# Altium PCB TAS5822.PcbDoc
Units mm, origin at the board's own origin, x right, y up, seen from the top; angles counter-clockwise.
Board outline 40 x 40 mm, 2 copper layers (Component Side, Solder Side), stack 1.57 mm thick; 38 components, 28 nets, 155 pads, 28 vias.
Unrouted connection lines stored in the file: 24.
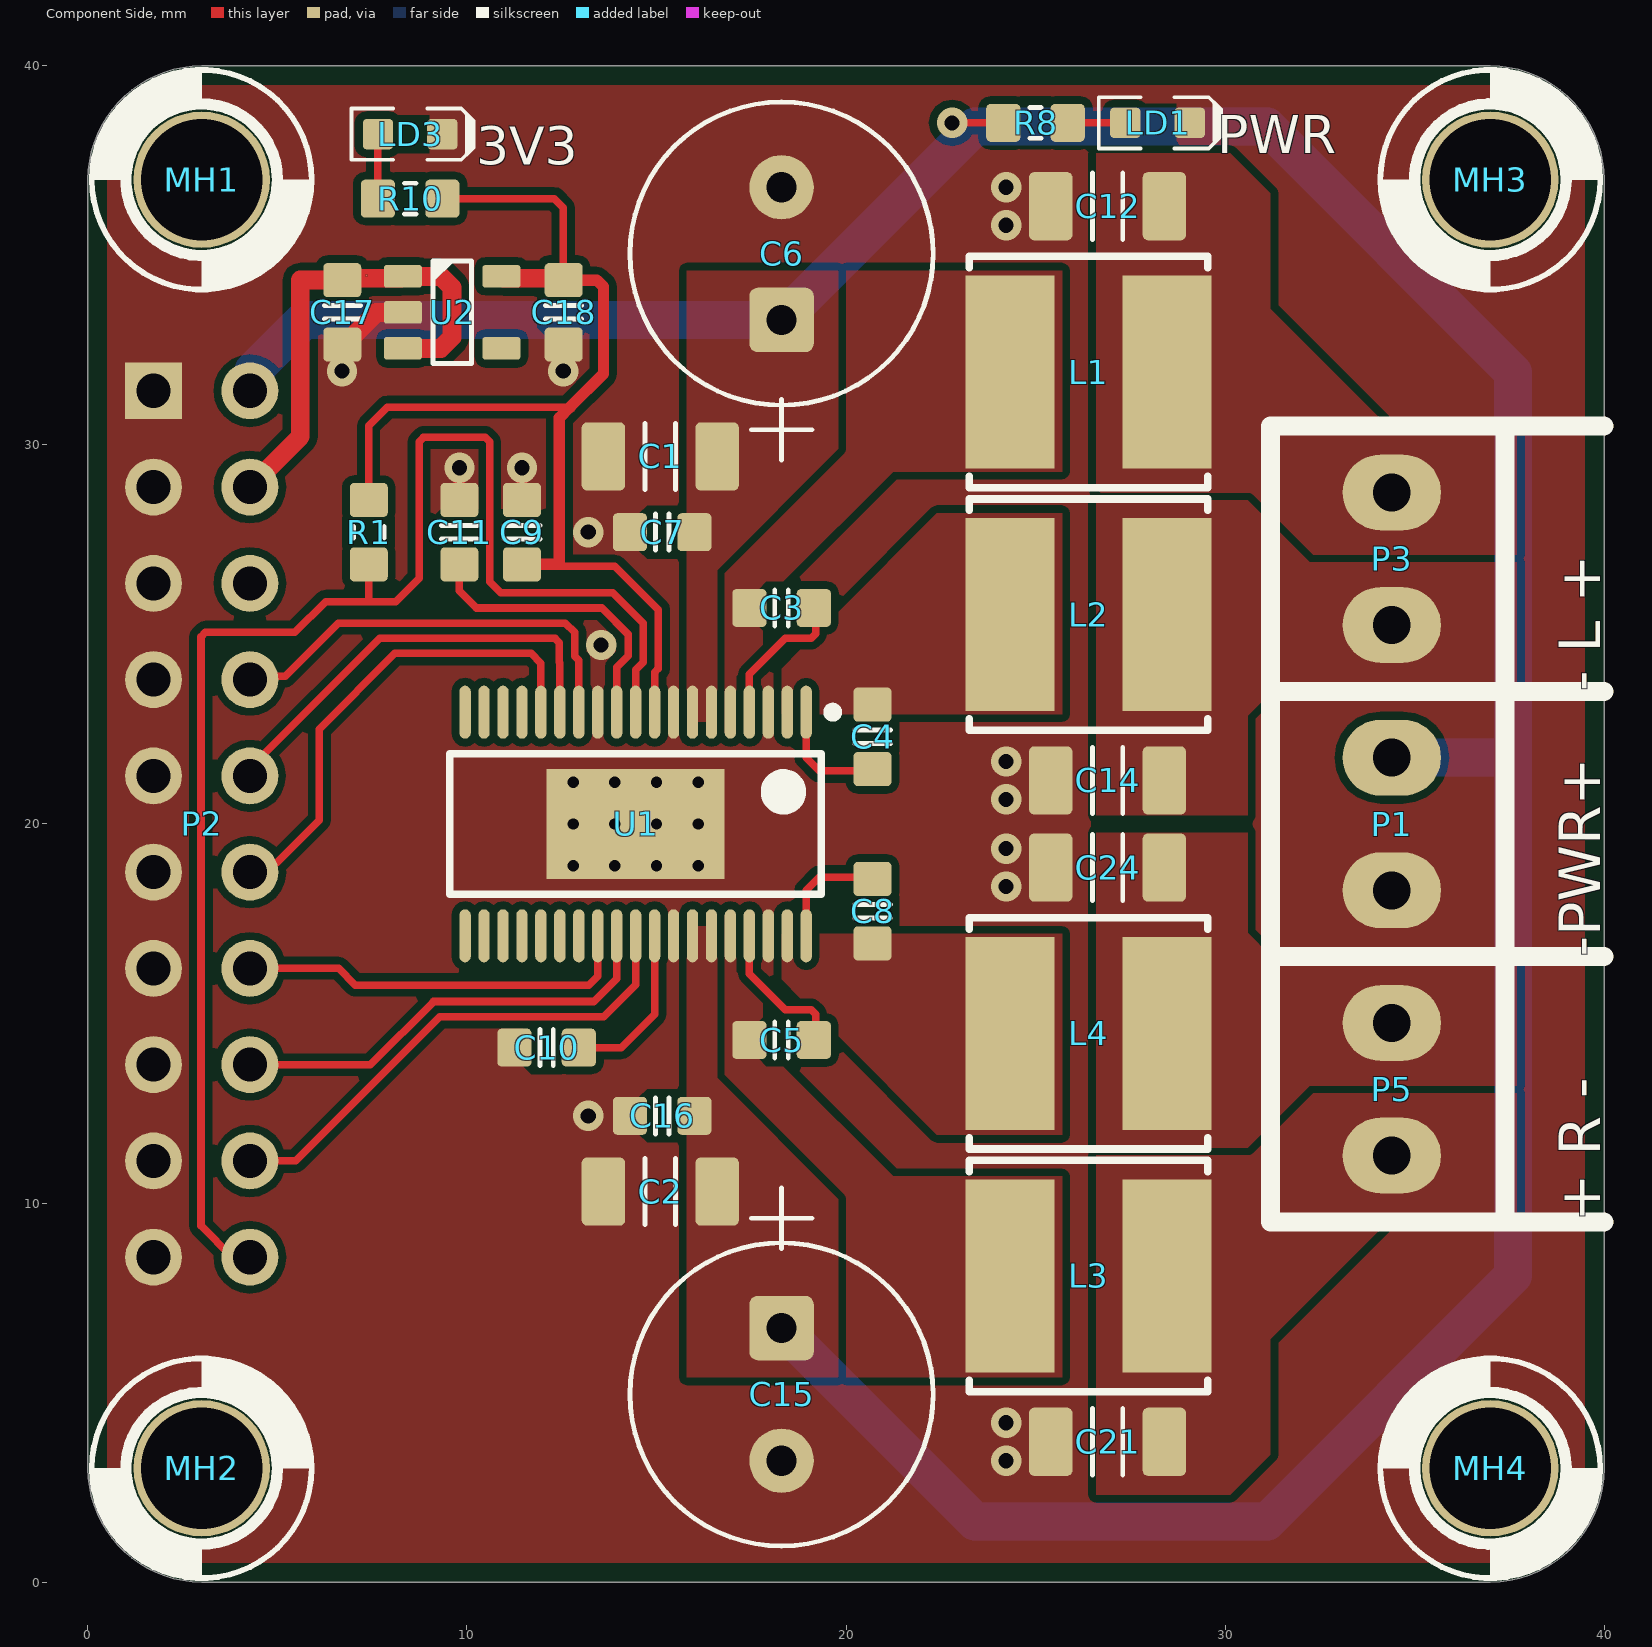
[diagram p0: Component Side view]
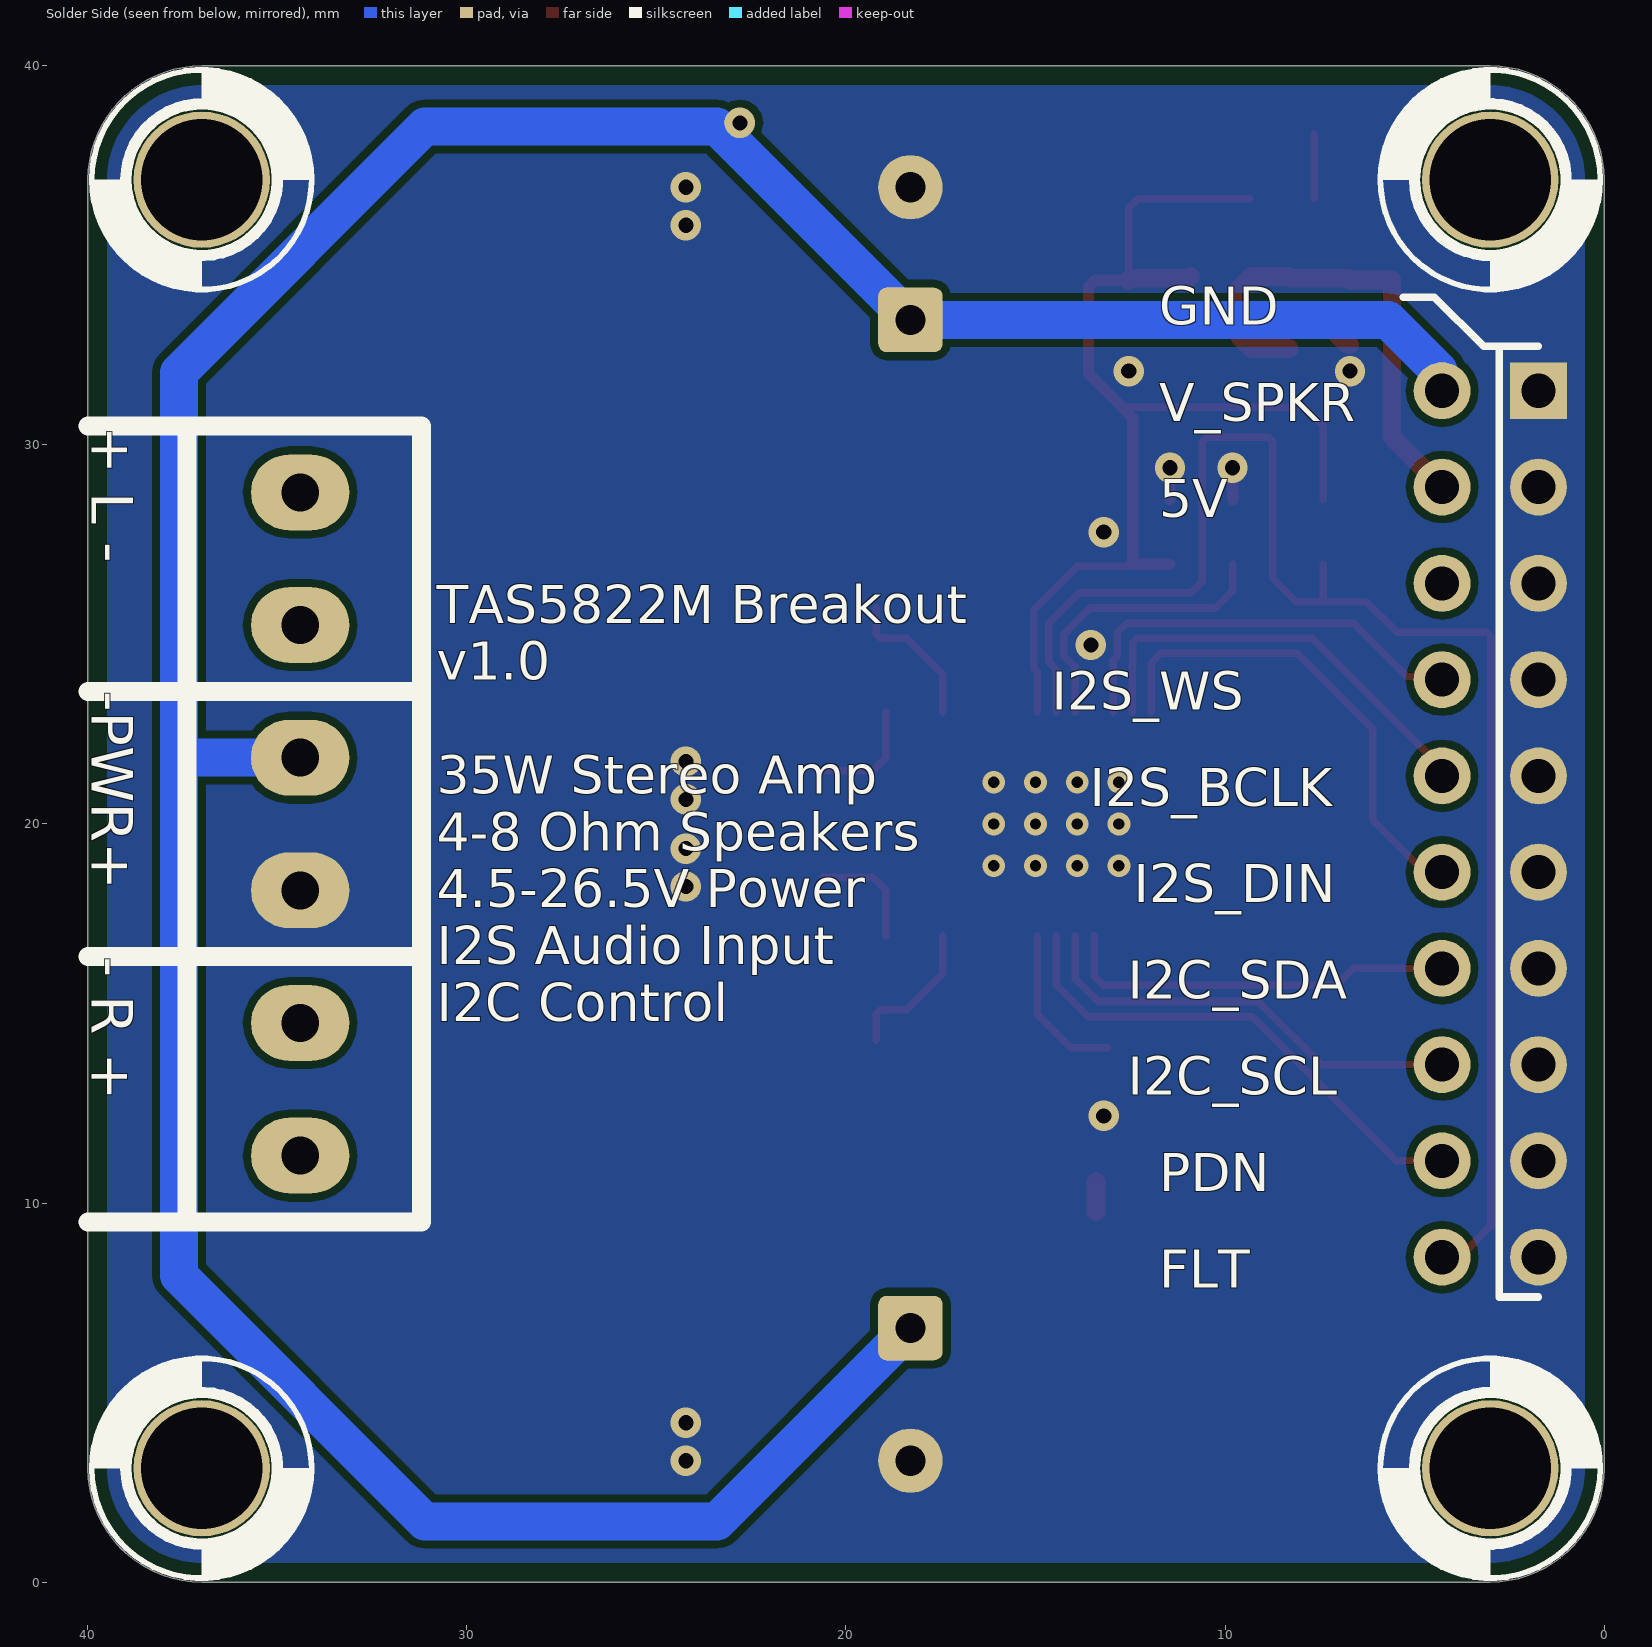
[diagram p1: Solder Side view, seen from below]
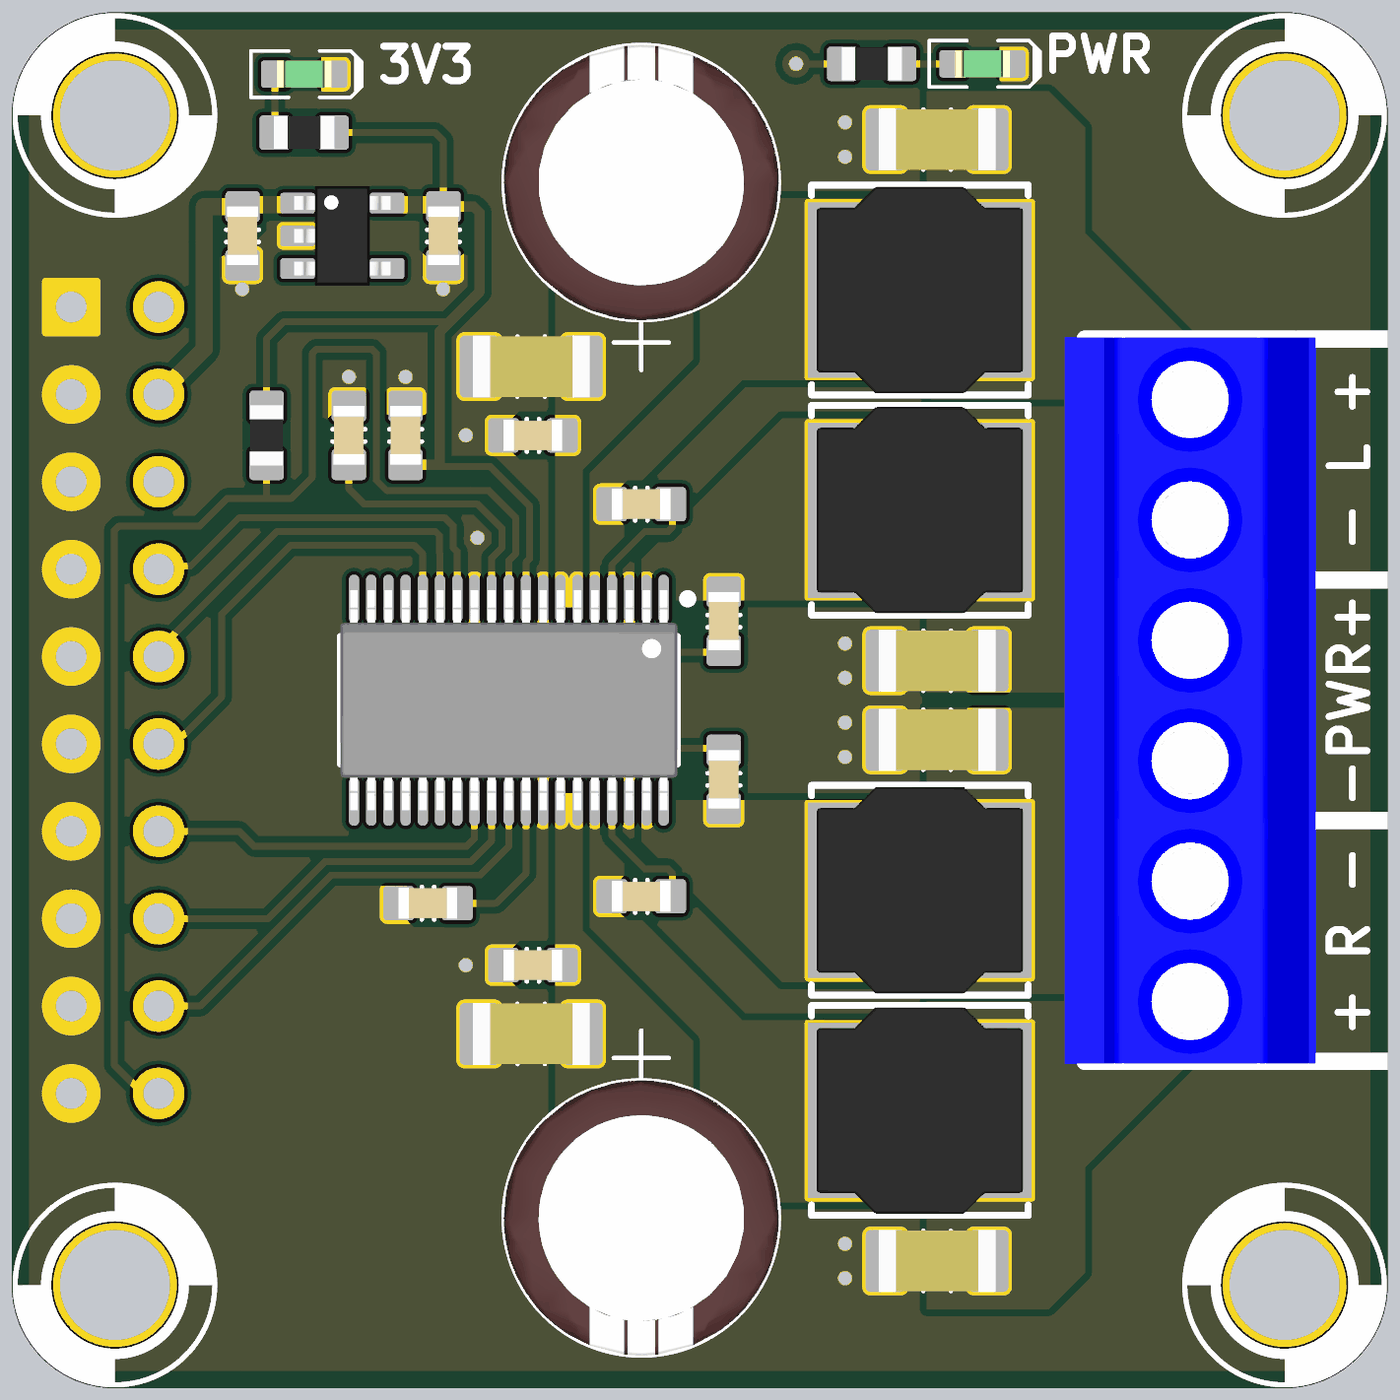
[diagram p2: 3D render of the assembled board from above, using the file's embedded part models]

## Layer stack, top to bottom
Top Solder: solder mask 0.0102, Solder Resist, Dk 3.5
Component Side: signal copper 0.035
Dielectric 3: prepreg 1.5, Dk 4.2
Solder Side: signal copper 0.035
Bottom Solder: solder mask 0.0102, Solder Resist, Dk 3.5

## Board outline
0,3 ccw(c3,3) 3,0 37,0 ccw(c37,3) 40,3 40,37 ccw(c37,37) 37,40 3,40 ccw(c3,37) 0,37

## Design rules (kind name [scope] priority, off if disabled: settings)
AssemblyTestPointUsage [All] p1 off:
AssemblyTestpoint [All] p1 off: testpointundercomponent=TRUE minsize=1.016 maxsize=2.54 preferedsize=1.524 minholesize=0 maxholesize=1.016 preferedholesize=0.813 testpointgrid=0.025 usegrid=TRUE gridtolerance=0 allowsidetop=TRUE allowsidebottom=TRUE
BoardOutlineClearance [All] p1: gap=0.254 ignorepadtopadclearanceinfootprint=FALSE except(0.5: Poly-OutlineEdge)
Clearance [All] p1: gap=0.2 ignorepadtopadclearanceinfootprint=FALSE
ComponentClearance [All] p1: gap=0.2 collisioncheckmode=3 verticalgap=0.25 showdistances=FALSE
DiffPairsRouting [All] p1: maxlimit=1 minlimit=0.254 mostfreqgap=0.254 toplayer_minwidth=0.2 toplayer_maxwidth=0.4 toplayer_prefwidth=0.254 bottomlayer_minwidth=0.2 bottomlayer_maxwidth=0.4 bottomlayer_prefwidth=0.254 maxuncoupledlength=12.7
FabricationTestPointUsage [All] p1 off: valid=0 allowmultiple=FALSE
FabricationTestpoint [All] p1 off: side=3 testpointundercomponent=TRUE minsize=1.016 maxsize=2.54 preferedsize=1.524 minholesize=0 maxholesize=1.016 preferedholesize=0.813 testpointgrid=0.025 allowsidetop=TRUE allowsidebottom=TRUE usegrid=TRUE gridtolerance=0
HoleSize [All] p1: absolutevalues=TRUE maxlimit=4 minlimit=0.025 maxpercent=80.000 minpercent=20.000
MinimumSolderMaskSliver [All] p1: minsoldermaskwidth=0
NetAntennae [All] p1 off: netantennaetolerance=0
PolygonConnect PolygonConnect_Via [All vs IsVia] p1: connectstyle=Direct reliefconductorwidth=0.254 reliefentries=4 polygonreliefangle="90 Angle" airgapwidth=0.254
PolygonConnect [All] p2: connectstyle=Direct reliefconductorwidth=0.254 reliefentries=4 polygonreliefangle="90 Angle" airgapwidth=0.254
RoutingVias [All] p1: holewidth=0.4 width=0.8 viastyle="Through Hole" minholewidth=0.3 minwidth=0.6 maxholewidth=1 maxwidth=1.5
SilkToSilkClearance [All] p1: silktosilkclearance=0.1
SilkToSolderMaskClearance SilkscreenOverComponentPads [IsPad] p1: minsilkscreentomaskgap=0 clearancetoexposedcopper=TRUE
SolderMaskExpansion [All] p1: expansion=0.102 istentingtop=FALSE
Width Width_1 [All] p1: maxlimit=3 minlimit=0.2 preferedwidth=0.2 minimp=50.000000 maximp=50.000000 favimp=50.000000
19 further rules are at their usual default settings.

## Components (designator, comment, footprint, x,y, rotation, side; value= is the part's Value field where it differs from the comment)
C1 "Capacitor" CAPC3216X100N 15.1,29.7 r0 top value=10µF
C2 "Capacitor" CAPC3216X100N 15.1,10.3 r0 top value=10µF
C3 "Capacitor" CAPC1608X90N 18.3,25.7 r180 top value=0.47µF
C4 "Capacitor" CAPC1608X90N 20.7,22.3 r90 top value=0.47µF
C5 "Capacitor" CAPC1608X90N 18.3,14.3 r180 top value=0.47µF
C6 "CapE-8.0-THT-220uF-35V" CAPAE250P680X1220_VERT 18.3,35.05 r90 top locked value="220uF 35V"
C7 "Capacitor" CAPC1608X90N 15.15,27.7 r0 top value=0.1µF
C8 "Capacitor" CAPC1608X90N 20.7,17.7 r270 top value=0.47µF
C9 "Capacitor" CAPC1608X90N 11.45,27.7 r270 top value=0.1µF
C10 "Capacitor" CAPC1608X90N 12.1,14.1 r0 top value=1µF
C11 "Capacitor" CAPC1608X90N 9.8,27.7 r270 top value=1µF
C12 "Capacitor" CAPC3216X100N 26.9,36.3 r0 top value=0.68µF
C14 "Capacitor" CAPC3216X100N 26.9,21.15 r180 top value=0.68µF
C15 "CapE-8.0-THT-220uF-35V" CAPAE250P680X1220_VERT 18.3,4.95 r270 top locked value="220uF 35V"
C16 "Capacitor" CAPC1608X90N 15.15,12.3 r0 top value=0.1µF
C17 "Capacitor" CAPC1608X90N 6.71,33.5 r90 top value=4.7µF
C18 "Capacitor" CAPC1608X90N 12.55,33.5 r90 top value=4.7µF
C21 "Capacitor" CAPC3216X100N 26.9,3.7 r0 top value=0.68µF
C24 "Capacitor" CAPC3216X100N 26.9,18.85 r180 top value=0.68µF
L1 "Inductor SMD 10uH 2.4A" "SRN6045TA SMD INDUCTOR" 26.4,31.925 r90 top value="4.7uH 4.2A"
L2 "Inductor SMD 10uH 2.4A" "SRN6045TA SMD Inductor" 26.4,25.525 r90 top value="4.7uH 4.2A"
L3 "Inductor SMD 10uH 2.4A" "SRN6045TA SMD INDUCTOR" 26.4,8.075 r90 top value="4.7uH 4.2A"
L4 "Inductor SMD 10uH 2.4A" "SRN6045TA SMD INDUCTOR" 26.4,14.475 r90 top value="4.7uH 4.2A"
LD1 "LEDG  0603" "LED 1608-0603" 28.219,38.5 r0 top
LD3 "LEDG  0603" "LED 1608-0603" 8.5,38.2 r0 top
MH1 "Screw Hole" M3-Hole-2 3,37 r90 top
MH2 "Screw Hole" M3-Hole-2 3,3 r0 top locked
MH3 "Screw Hole" M3-Hole-2 37,37 r0 top
MH4 "Screw Hole" M3-Hole-2 37,3 r90 top
P1 "PWR_TERM" "TERM2 3.5mm" 34.4,21.75 r270 top
P2 "Header 10X2H" HDR2X10H 1.73,31.43 r270 top
P3 "SPKR_LEFT_TERM" "TERM2 3.5mm" 34.4,28.75 r270 top
P5 "SPKR_RIGHT_TERM" "TERM2 3.5mm" 34.4,14.75 r270 top
R1 "Resistor" "RES 1608-0603" 7.41,27.7 r90 top value=4.7K
R8 "Resistor" "RES 1608-0603" 25,38.5 r180 top value=10K
R10 "Resistor" "RES 1608-0603" 8.5,36.5 r0 top value=1K
U1 "TAS5822M" TSSOP50P640X120_HS-39N 14.45,20 r270 top
U2 "AP2112K-3.3TRG1" SOT23-5 9.61,33.5 r0 top

## Footprints (in the part's own frame and the unit in brackets; to place one, negate y for a bottom-side part, rotate by r counter-clockwise, add the part's x,y. Pads: shape width x height; smd on the part's side, far side on the other; paste and mask are expansions set on the pad)
CAPAE250P680X1220_VERT [mm]
  round 0.508 on Mech15: 0(0,0)
  rrect25% 1.7x1.7 hole 0.8: 1(-1.75,0)
  round 1.7 hole 0.8: 2(1.75,0)
  silkscreen extent -5.45,-4 4,4, body extent -4,-4 4,4, height 11.5
CAPC1608X90N [mm] "Chip Capacitor, Body 1.6x0.8mm, EIA 0603, IPC Medium Density"
  round 0.254 on Mech15: 0(0,0)
  rrect25% 0.9x1 smd: 1(-0.85,0) 2(0.85,0)
  Component Side pour cut-out: -0.6,0.5 -0.4,0.7 0.4,0.7 0.6,0.5 0.6,-0.5 0.4,-0.7 -0.4,-0.7 -0.6,-0.5
  silkscreen extent -0.18,-0.48 0.18,0.48, body extent -0.85,-0.45 0.85,0.45, height 0.89
CAPC3216X100N [mm] "Chip Capacitor, Body 3.2x1.6mm, 1.0mm H, EIA 1206, IPC Medium Density"
  round 0.508 on Mech15: 0(0,0)
  rrect25% 1.15x1.8 smd: 1(-1.5,0) 2(1.5,0)
  silkscreen extent -0.4,-0.88 0.4,0.88, body extent -1.7,-0.9 1.7,0.9, height 1
HDR2X10H [mm] "Connector; Header; 10x2 Position; Right Angle"
  rect 1.5x1.5 hole 0.9: 1(0,0)
  round 1.5 hole 0.9: 2(0,2.54) 3(2.54,0) 4(2.54,2.54) 5(5.08,0) 6(5.08,2.54) 7(7.62,0) 8(7.62,2.54) 9(10.16,0) 10(10.16,2.54) 11(12.7,0) 12(12.7,2.54) 13(15.24,0) 14(15.24,2.54) 15(17.78,0) 16(17.78,2.54) 17(20.32,0) 18(20.32,2.54) 19(22.86,0) 20(22.86,2.54)
"LED 1608-0603" [mm]
  round 0.254 on Mech15: 0(0,0)
  rrect25% 0.8x0.8 smd: 1(-0.85,0) 2(0.85,0)
  Component Side pour cut-out: -0.5,0.5 0.5,0.5 0.5,-0.5 -0.5,-0.5
  silkscreen extent -1.55,-0.67 1.68,0.67, body extent -0.8,-0.4 0.8,0.4, height 0.75
M3-Hole-2 [mm]
  round 3.6 hole 3.2: M3(0,0)
  silkscreen extent -2.9,-2.93 2.9,2.93
"RES 1608-0603" [mm]
  round 0.254 on Mech15: 0(0,0)
  rrect25% 0.9x1 smd: 1(-0.85,0) 2(0.85,0)
  Component Side pour cut-out: -0.6,0.5 -0.4,0.7 0.4,0.7 0.6,0.5 0.6,-0.5 0.4,-0.7 -0.4,-0.7 -0.6,-0.5
  silkscreen extent -0.15,-0.41 0.15,0.41, body extent -0.87,-0.47 0.88,0.48, height 0.54
SOT23-5 [mm]
  round 0.5 on Mech15: 0(0,0)
  rrect25% 1x0.6 smd: 1(-1.3,0.95) 2(-1.3,0) 3(-1.3,-0.95) 4(1.3,-0.95) 5(1.3,0.95)
  silkscreen extent -0.51,-1.35 0.51,1.35, body extent -1.4,-1.45 1.4,1.45, height 1.44
"SRN6045TA SMD INDUCTOR" [mm]
  rect 5.1x2.35 smd: 1(0,2.075) 2(0,-2.075)
  silkscreen extent -3.05,-3.15 3.05,3.15, body extent -3,-3 3,3, height 4.2
"SRN6045TA SMD Inductor" [mm]
  rect 5.1x2.35 smd: 1(0,2.075) 2(0,-2.075)
  silkscreen extent -3.05,-3.15 3.05,3.15, body extent -3,-3 3,3, height 4.2
"TERM2 3.5mm" [mm]
  oval 2x2.6 hole 1: 1(0,0) 2(3.5,0)
  body extent -1.8,-3.79 5.31,3.5, height 8.51
TSSOP50P640X120_HS-39N [mm] "TSSOP, 38-Leads, Body 9.70x4.40mm, Pitch 0.50mm, Thermal Pad 4.70x2.90mm, IPC Medium Density"
  oval 1.4x0.3 smd: 1(-2.95,4.5) 2(-2.95,4) 3(-2.95,3.5) 4(-2.95,3) 5(-2.95,2.5) 6(-2.95,2) 7(-2.95,1.5) 8(-2.95,1) 9(-2.95,0.5) 10(-2.95,0) 11(-2.95,-0.5) 12(-2.95,-1) 13(-2.95,-1.5) 14(-2.95,-2) 15(-2.95,-2.5) 16(-2.95,-3) 17(-2.95,-3.5) 18(-2.95,-4) 19(-2.95,-4.5) 20(2.95,-4.5) 21(2.95,-4) 22(2.95,-3.5) 23(2.95,-3) 24(2.95,-2.5) 25(2.95,-2) 26(2.95,-1.5) 27(2.95,-1) 28(2.95,-0.5) 29(2.95,0) 30(2.95,0.5) 31(2.95,1) 32(2.95,1.5) 33(2.95,2) 34(2.95,2.5) 35(2.95,3) 36(2.95,3.5) 37(2.95,4) 38(2.95,4.5)
  rect 2.9x4.7 smd: 39(0,0)
  silkscreen extent -3.07,-4.9 1.85,5.33, body extent -3.2,-4.9 3.2,4.9, height 1.2

## Part data
C1 C2: library part GMK316BBJ106MLHT, "CAP CER 10UF 35V X5R 1206", Manufacturer 1="Taiyo Yuden", Operating Temperature="-55°C ~ 85°C", Package=0402, Package / Case="1206 (3216 Metric)", Supplier Part Number 1=587-4898-1-ND, Temperature Coefficient=X5R, TOLERANCE=±20%, Voltage=35V, Manufacturer Part Number 1=GMK316BBJ106MLHT, Note="Approved sub OK", Revision="July-2002: Re-released for DXP Platform.", Size / Dimension="0.126\" L x 0.063\" W (3.20mm x 1.60mm)", Supplier 1=Digi-Key, Thickness (Max)="0.075\" (1.90mm)", Type=X5R
C3 C4 C5 C8: library part GMJ107BB7474KAHT, "CAP CER 0.47UF 35V X7R 0603", Manufacturer 1="Taiyo Yuden", Operating Temperature="-55°C ~ 125°C", Package=0402, Package / Case="0603 (1608 Metric)", Supplier Part Number 1=587-4355-1-ND, Temperature Coefficient=X7R, TOLERANCE=±10%, Voltage=35V, Manufacturer Part Number 1=GMJ107BB7474KAHT, Note="Approved sub OK", Revision="July-2002: Re-released for DXP Platform.", Size / Dimension="0.063\" L x 0.031\" W (1.60mm x 0.80mm)", Supplier 1=Digi-Key, Thickness (Max)="0.035\" (0.90mm)", Type=X5R
C6 C15: "CAP ALUM 220UF 20% 35V RADIAL", Supplier Part Number 1=732-8946-1-ND, Note="Approved sub OK", Published=8-Jun-2000, Publisher="Altium Limited", Revision="July-2002: Re-released for DXP Platform.", Supplier 1=Digi-Key
C7 C9 C16: library part UMJ107BB7104KAHT, "CAP CER 0.1UF 50V X7R 0603", Manufacturer 1="Taiyo Yuden", Operating Temperature="-55°C ~ 125°C", Package=0402, Package / Case="0603 (1608 Metric)", Supplier Part Number 1=587-4474-1-ND, Temperature Coefficient=X7R, TOLERANCE=±10%, Voltage=50V, Manufacturer Part Number 1=UMJ107BB7104KAHT, Note="Approved sub OK", Revision="July-2002: Re-released for DXP Platform.", Size / Dimension="0.063\" L x 0.031\" W (1.60mm x 0.80mm)", Supplier 1=Digi-Key, Thickness (Max)="0.039\" (1.00mm)", Type=X5R
C10 C11: library part GMK107BJ105KAHT, "CAP CER 1UF 35V X5R 0603", Manufacturer 1="Taiyo Yuden", Operating Temperature="-55°C ~ 85°C", Package=0402, Package / Case="0603 (1608 Metric)", Supplier Part Number 1=587-3358-1-ND, Temperature Coefficient=X5R, TOLERANCE=±10%, Voltage=35V, Manufacturer Part Number 1=GMK107BJ105KAHT, Note="Approved sub OK", Revision="July-2002: Re-released for DXP Platform.", Size / Dimension="0.063\" L x 0.031\" W (1.60mm x 0.80mm)", Supplier 1=Digi-Key, Thickness (Max)="0.035\" (0.90mm)", Type=X5R
C12 C14 C21 C24: library part C3216X7R2A684K160AA, "CAP CER 0.68UF 100V X7R 1206", Manufacturer 1="TDK Corporation", Operating Temperature="-55°C ~ 125°C", Package=0402, Package / Case="1206 (3216 Metric)", Supplier Part Number 1=445-14810-1-ND, Temperature Coefficient=X7R, TOLERANCE=±10%, Voltage=100V, Manufacturer Part Number 1=C3216X7R2A684K160AA, Note="Approved sub OK", Revision="July-2002: Re-released for DXP Platform.", Size / Dimension="0.126\" L x 0.063\" W (3.20mm x 1.60mm)", Supplier 1=Digi-Key, Thickness (Max)="0.071\" (1.80mm)", Type=X5R
C17 C18: library part C1608X5R1C475K080AC, "CAP CER 4.7UF 16V X5R 0603", Manufacturer 1="TDK Corporation", Operating Temperature="-55°C ~ 85°C", Package=0402, Package / Case="0603 (1608 Metric)", Supplier Part Number 1=445-7478-1-ND, Temperature Coefficient=X5R, TOLERANCE=±10%, Voltage=16V, Manufacturer Part Number 1=C1608X5R1C475K080AC, Note="Approved sub OK", Revision="July-2002: Re-released for DXP Platform.", Size / Dimension="0.063\" L x 0.031\" W (1.60mm x 0.80mm)", Supplier 1=Digi-Key, Thickness (Max)="0.035\" (0.90mm)", Type=X5R
L1 L2 L3 L4: library part "Inductor SMD 33uH 2.5A", "FIXED IND 4.7UH 4.2A 35 MOHM SMD", Supplier Part Number 1=445-173055-1-ND, Published=24-Mar-1999, Publisher="Altium Limited", Revision="July-2002: Re-released for DXP Platform.", Supplier 1=Digikey
LD1 LD3: "LED GREEN CLEAR CHIP SMD 0603", Supplier Part Number 1=160-1435-2-ND, Note="Approved sub OK", Supplier 1=Digi-Key
P1 P3 P5: library part ScrewTerminal-3.5mm-2Way, "Screw Terminal 3.5mm 2-Way", Supplier Part Number 1=277-5719-ND, Note="Approved sub OK", Supplier 1=Digi-Key
P2: "Header, 10-Pin, Dual row, Right Angle", Manufacturer 1="Generic Header", LatestRevisionDate=17-Jul-2002, LatestRevisionNote="Re-released for DXP Platform.", Note="Approved sub OK", Publisher="Altium Limited"
R1: library part RC0603FR-074K7L, "RES SMD 4.7K OHM 1% 1/10W 0603", Manufacturer 1=Yageo, Operating Temperature="-55°C ~ 155°C", Package / Case="0603 (1608 Metric)", Power (Watts)="0.1W, 1/10W", Supplier Part Number 1=311-4.70KHRCT-ND, Temperature Coefficient=±100ppm/°C, TOLERANCE=±1%, Composition="Thick Film", Features="Moisture Resistant", Height - Seated (Max)="0.022\" (0.55mm)", Manufacturer Part Number 1=RC0603FR-074K7L, Note="Approved sub OK", Published=8-Jun-2000, Publisher="Altium Limited", Revision="July-2002: Re-released for DXP Platform.", Size / Dimension="0.063\" L x 0.031\" W (1.60mm x 0.80mm)", Supplier 1=Digi-Key
R8: library part RC0603FR-0710KL, "RES SMD 10K OHM 1% 1/10W 0603", Manufacturer 1=Yageo, Operating Temperature="-55°C ~ 155°C", Package / Case="0603 (1608 Metric)", Power (Watts)="0.1W, 1/10W", Supplier Part Number 1=311-10.0KHRCT-ND, Temperature Coefficient=±100ppm/°C, TOLERANCE=±1%, Composition="Thick Film", Features="Moisture Resistant", Height - Seated (Max)="0.022\" (0.55mm)", Manufacturer Part Number 1=RC0603FR-0710KL, Note="Approved sub OK", Published=8-Jun-2000, Publisher="Altium Limited", Revision="July-2002: Re-released for DXP Platform.", Size / Dimension="0.063\" L x 0.031\" W (1.60mm x 0.80mm)", Supplier 1=Digi-Key
R10: library part RC0603FR-071KL, "RES SMD 1K OHM 1% 1/10W 0603", Manufacturer 1=Yageo, Operating Temperature="-55°C ~ 155°C", Package / Case="0603 (1608 Metric)", Power (Watts)="0.1W, 1/10W", Supplier Part Number 1=311-1.00KHRCT-ND, Temperature Coefficient=±100ppm/°C, TOLERANCE=±1%, Composition="Thick Film", Features="Moisture Resistant", Height - Seated (Max)="0.022\" (0.55mm)", Manufacturer Part Number 1=RC0603FR-071KL, Note="Approved sub OK", Published=8-Jun-2000, Publisher="Altium Limited", Revision="July-2002: Re-released for DXP Platform.", Size / Dimension="0.063\" L x 0.031\" W (1.60mm x 0.80mm)", Supplier 1=Digi-Key
U1: library part "IC - DAC, I2S Amplifier - TAS5822M", "35-W, INDUCTOR-LESS, DIGITAL INP", Supplier Part Number 1=296-TAS5822MDCPRCT-ND, Supplier 1=Digikey
U2: library part "Regulator - AP2112K 3.3V Linear Regulator", "IC REG LINEAR 3.3V 600MA SOT25", Manufacturer 1="Diodes Incorporated", Supplier Part Number 1=AP2112K-3.3TRG1DICT-ND, Manufacturer Part Number 1=AP2112K-3.3TRG1, Supplier 1=Digi-Key

## Via types
v1: diameter 0.8, hole 0.4, Component Side to Solder Side, tented both sides, 16 vias
v2: diameter 0.6, hole 0.3, Component Side to Solder Side, tented bottom, 12 vias

## Nets (pads, with @x,y where several pads share a name; then routed paths per layer and width w, separated by ;. In a path a pad name is that pad's centre, name@x,y a point inside that pad or via, vN(x,y) a via of type N, cw(c..) or ccw(c..) an arc to the next point about the centre after c; other vN are vias at no path point)
+3V3: C9.2 C18.2 R1.2 R10.2 U1.9 U2.5 | length 29.9
  Component Side w0.2: R1.2 7.41,30.51 7.9,31 12.72,31 ; R10.2 12.3,36.5 12.54,36.26 C18.2@12.54,34.45 ; 12.439,26.8 13.9,26.8 15.05,25.65 15.05,24.103 14.95,24.003 U1.9
  Component Side w0.3: C9.2 12.439,26.85 ; 12.439,26.939 12.439,30.719 12.72,31 13.6,31.88 13.6,34.174 13.424,34.35 C18.2
  Component Side w0.5: U2.5 10.96,34.4 12.5,34.4 C18.2
+5V: C17.2 P2.4 U2.1 U2.3 | length 12.9
  Component Side w0.5: P2.4 5.6,30.22 5.6,34.35 C17.2 6.76,34.4 8.26,34.4 U2.1 9.307,34.45 9.6,34.157 9.6,32.843 9.307,32.55 U2.3
GND: C1.1 C2.1 C6.2 C7.1 C9.1 C10.1 C11.1 C12.1 C14.2 C15.2 C16.1 C17.1 C18.1 C21.1 C24.2 LD1.2 LD3.2 P1.2 P2.1 P2.3 P2.5 P2.7 P2.9 P2.11 P2.13 P2.15 P2.17 P2.19 U1.3 U1.8 U1.12 U1.31 U1.36 U1.39 U2.2 | length 4.4
  Component Side w0.3: C11.1 v1(9.8,29.4) ; C9.1 v1(11.45,29.4)
  Component Side w0.5: C17.1 6.76,32.65 7.6,33.49 7.6,33.5 U2.2 ; C2.1@13.4,9.775 C2.1@13.4,10.55
  other v1: 24.225,3.2 24.225,4.2 13.2,12.3 24.225,18.35 24.225,19.35 24.225,20.65 24.225,21.65 13.539,24.721 13.2,27.7 6.7,31.95 12.54,31.95 24.225,35.8 24.225,36.8
  other v2: 12.8,18.9 13.9,18.9 15,18.9 16.1,18.9 12.8,20 13.9,20 15,20 16.1,20 12.8,21.1 13.9,21.1 15,21.1 16.1,21.1
GPIO_1: P2.18 U1.29 | length 13.9
  Component Side w0.2: P2.18@3.81,11.11 5.476,11.11 9.282,14.916 13.61,14.916 14.45,15.756 U1.29
GPIO_2: P2.20 R1.1 U1.10 | length 40.3
  Component Side w0.2: P2.20@3.81,8.57 2.982,9.398 2.982,24.939 3.1,25.057 5.457,25.057 6.269,25.869 7.31,25.869 7.41,25.869 ; R1.1 7.41,25.869 ; U1.10 14.45,24.069 14.65,24.269 14.65,25.3 13.85,26.1 10.892,26.1 10.6,26.392 10.6,30.083 10.483,30.2 8.853,30.2 8.736,30.083 8.736,26.486 8.119,25.869 7.41,25.869
I2C_SCL: P2.16 U1.28 | length 12.2
  Component Side w0.2: P2.16@3.81,13.65 7.45,13.65 9.116,15.316 13.349,15.316 13.95,15.917 U1.28
I2C_SDA: P2.14 U1.27 | length 11
  Component Side w0.2: P2.14@3.81,16.19 6.61,16.19 7.05,15.75 13.217,15.75 13.45,15.983 U1.27
I2S_SPK_BCLK: P2.10 U1.14 | length 12
  Component Side w0.2: P2.10@3.81,21.27 4.07,21.27 7.7,24.9 12.322,24.9 12.439,24.783 12.439,24.266 12.45,24.254 U1.14
I2S_SPK_DOUT: P2.12 U1.15 | length 12.9
  Component Side w0.2: P2.12 4.519,18.979 4.979,18.979 6.1,20.1 6.1,22.5 8.1,24.5 11.697,24.5 11.95,24.247 U1.15
I2S_SPK_MCLK: P2.6
I2S_SPK_WS: P2.8 U1.13 | length 11.4
  Component Side w0.2: P2.8 4.363,23.903 5.203,23.903 6.6,25.3 12.595,25.3 12.839,25.057 12.839,24.431 12.95,24.32 U1.13
NetC3_1: C3.1 U1.4 | length 3.9
  Component Side w0.2: U1.4 17.45,23.95 18.4,24.9 19.083,24.9 19.2,25.017 C3.1@19.2,25.7
NetC3_2: C3.2 L1.1 U1.5
NetC4_1: C4.1 U1.1 | length 3
  Component Side w0.2: U1.1 18.95,21.75 19.3,21.4 C4.1@20.6,21.4
NetC4_2: C4.2 L2.1 U1.2
NetC5_1: C5.1 U1.35 | length 3.9
  Component Side w0.2: U1.35 17.45,16.05 18.4,15.1 19.083,15.1 19.2,14.983 C5.1@19.2,14.3
NetC5_2: C5.2 L3.1 U1.34
NetC8_1: C8.1 U1.38 | length 3
  Component Side w0.2: U1.38 18.95,18.25 19.3,18.6 C8.1@20.6,18.6
NetC8_2: C8.2 L4.1 U1.37
NetC10_2: C10.2 U1.30 | length 4.3
  Component Side w0.2: C10.2@13.094,14.1 14.075,14.1 14.95,14.975 U1.30
NetC11_2: C11.2 U1.11 | length 7.8
  Component Side w0.2: C11.2 9.8,26.15 10.25,25.7 13.55,25.7 14.25,25 14.25,24.434 13.95,24.134 U1.11
NetC12_2: C12.2 L1.2 P3.1
NetC14_1: C14.1 L2.2 P3.2
NetC21_2: C21.2 L3.2 P5.2
NetC24_1: C24.1 L4.2 P5.1
NetLD1_1: LD1.1 R8.1 | length 1.5
  Component Side w0.2: R8.1 LD1.1
NetLD3_1: LD3.1 R10.1 | length 1.7
  Component Side w0.2: R10.1 LD3.1
V_SPKR: C1.2 C2.2 C6.1 C7.2 C15.1 C16.2 P1.1 P2.2 R8.2 U1.6 U1.7 U1.32 U1.33 | length 91.4
  Component Side w0.2: v1(22.8,38.5) R8.2
  Solder Side w1: P2.2 4.366,31.526 4.366,31.966 5.7,33.3 C6.1 23.15,38.15 23.25,38.25 ; C15.1 23.4,1.6 31.114,1.6 37.6,8.086 37.6,21.7 ; 23.4,38.4 31.114,38.4 37.6,31.914 37.6,21.7 ; P1.1 37.55,21.75 37.6,21.7
pads on no net: C1.0 C2.0 C3.0 C4.0 C5.0 C6.0 C7.0 C8.0 C9.0 C10.0 C11.0 C12.0 C14.0 C15.0 C16.0 C17.0 C18.0 C21.0 C24.0 LD1.0 LD3.0 MH1.M3 MH2.M3 MH3.M3 MH4.M3 R1.0 R8.0 R10.0 U1.16 U1.17 U1.18 U1.19 U1.20 U1.21 U1.22 U1.23 U1.24 U1.25 U1.26 U2.0 U2.4

## Polygon pours and split planes (outlines as drawn)
NetC21_2 on Component Side "NETC21_2_L01_P026" (solid, pour order 26): 26.6,2.3 26.6,13.1 37.7,13.1 37.7,9.5 34.3,9.5 31.2,6.4 31.2,3.358 30.142,2.3
NetC24_1 on Component Side "NETC24_1_L01_P025" (solid, pour order 25): 26.6,19.775 26.6,11.46 30.598,11.46 32.238,13.1 37.7,13.1 37.7,16.481 31.227,16.498 30.6,17.127 30.598,19.775
NetC12_2 on Component Side "NETC12_2_L01_P024" (solid, pour order 24): 26.6,37.7 26.6,26.9 37.7,26.9 37.7,30.5 34.3,30.5 31.2,33.6 31.2,36.642 30.142,37.7
NetC14_1 on Component Side "NETC14_1_L01_P023" (solid, pour order 23): 26.6,20.225 26.6,28.54 30.598,28.54 32.238,26.9 37.7,26.9 37.7,23.519 31.243,23.502 30.6,22.857 30.598,20.225
NetC8_2 on Component Side "NETC8_2_L01_P022" (solid, remove dead copper, pour order 22): 18.3,17.1 18.3,15.9 22.4,11.8 25.7,11.8 25.7,17.1
NetC5_2 on Component Side "NETC5_2_L01_P021" (solid, pour order 21): 16.8,17.7 16.8,13.2 19.6,10.4 19.6,5.4 25.7,5.4 25.7,10.7 21.25,10.7 17.8,14.15 17.8,15.4 17.1,16.1 17.1,17.7
V_SPKR on Component Side "V_SPKR_L01_P020" (solid, pour order 20): 15.8,17.3 16.6,17.3 16.6,13.3 19.8,10.1 19.8,5.4 15.8,5.4
NetC4_2 on Component Side "NETC4_2_L01_P019" (solid, pour order 19): 18.3,22.9 18.3,24.1 22.4,28.2 25.7,28.2 25.7,22.9
NetC3_2 on Component Side "NETC3_2_L01_P018" (solid, pour order 18): 16.8,22.3 16.8,26.8 19.6,29.6 19.6,34.6 25.7,34.6 25.7,29.3 21.25,29.3 17.8,25.85 17.8,24.6 17.1,23.9 17.1,22.3
V_SPKR on Component Side "V_SPKR_L01_P016" (solid, pour order 16): 15.8,22.7 16.6,22.7 16.6,26.7 19.8,29.9 19.8,34.6 15.8,34.6
GND on Component Side "GND_L01_P027" (solid, pour order 27): 0,0 0,40 40,40 40,0
GND on Solder Side "GND_L02_P017" (solid, pour order 17): 0,0 0,40 40,40 40,0

## Silkscreen, mask and mechanical layers (free items; w line width, h text height)
Top Overlay:
  lines w0.5: 31.2,16.5 40,16.5 ; 31.2,23.5 40,23.5 ; 37.39,9.5 37.39,30.5 ; 40,9.5 31.2,9.5 31.2,30.5 40,30.5
  text "PWR" at 29.801,37.7 h1
  text "3V3" at 10.251,37.4 h1
  text "- L +" at 39.9,23.5 h1.1 r90
  text "-PWR+" at 39.9,16.5 h1.1 r90
  text "+ R -" at 39.9,9.5 h1.1 r90
Bottom Overlay:
  lines w0.2: 1.73,7.52 2.76,7.52 2.76,32.6 ; 1.73,32.6 3.175,32.6 4.475,33.9 5.3,33.9
  lines w0.5: 31.2,16.5 40,16.5 ; 31.2,23.5 40,23.5 ; 37.39,9.5 37.39,30.5 ; 40,9.5 31.2,9.5 31.2,30.5 40,30.5
  text "GND" at 11.735,33.17 h1
  text "V_SPKR" at 11.735,30.63 h1
  text "+ L -" at 39.9,30.5 h1.1 r90
  text "5V" at 11.735,28.09 h1
  text "-PWR+" at 39.9,23.5 h1.1 r90
  text "I2S_WS" at 14.567,23.01 h1
  text "I2S_BCLK" at 13.568,20.47 h1
  text "I2S_DIN" at 12.401,17.93 h1
  text "- R +" at 39.9,16.5 h1.1 r90
  text "I2C_SDA" at 12.568,15.39 h1
  text "TAS5822M Breakout / v1.0 /  / 35W Stereo Amp / 4-8 Ohm Speakers / 4.5-26.5V Power / I2S Audio Input / I2C Control" at 30.8,14.8 h1
  text "I2C_SCL" at 12.568,12.85 h1
  text "PDN" at 11.735,10.31 h1
  text "FLT" at 11.735,7.77 h1
Top Courtyard:
  lines w0.254: 0,20 40,20
Mechanical 4:
  the board outline again, w0.254

## Dimensions
3,3 to 3,37 on Mechanical 1
3,3 to 37,3 on Mechanical 1
3,0 to 3,40 on Mechanical 1
0,37 to 40,37 on Mechanical 1